# EAGLE board midi_to_cv (EAGLE 7.2.0)
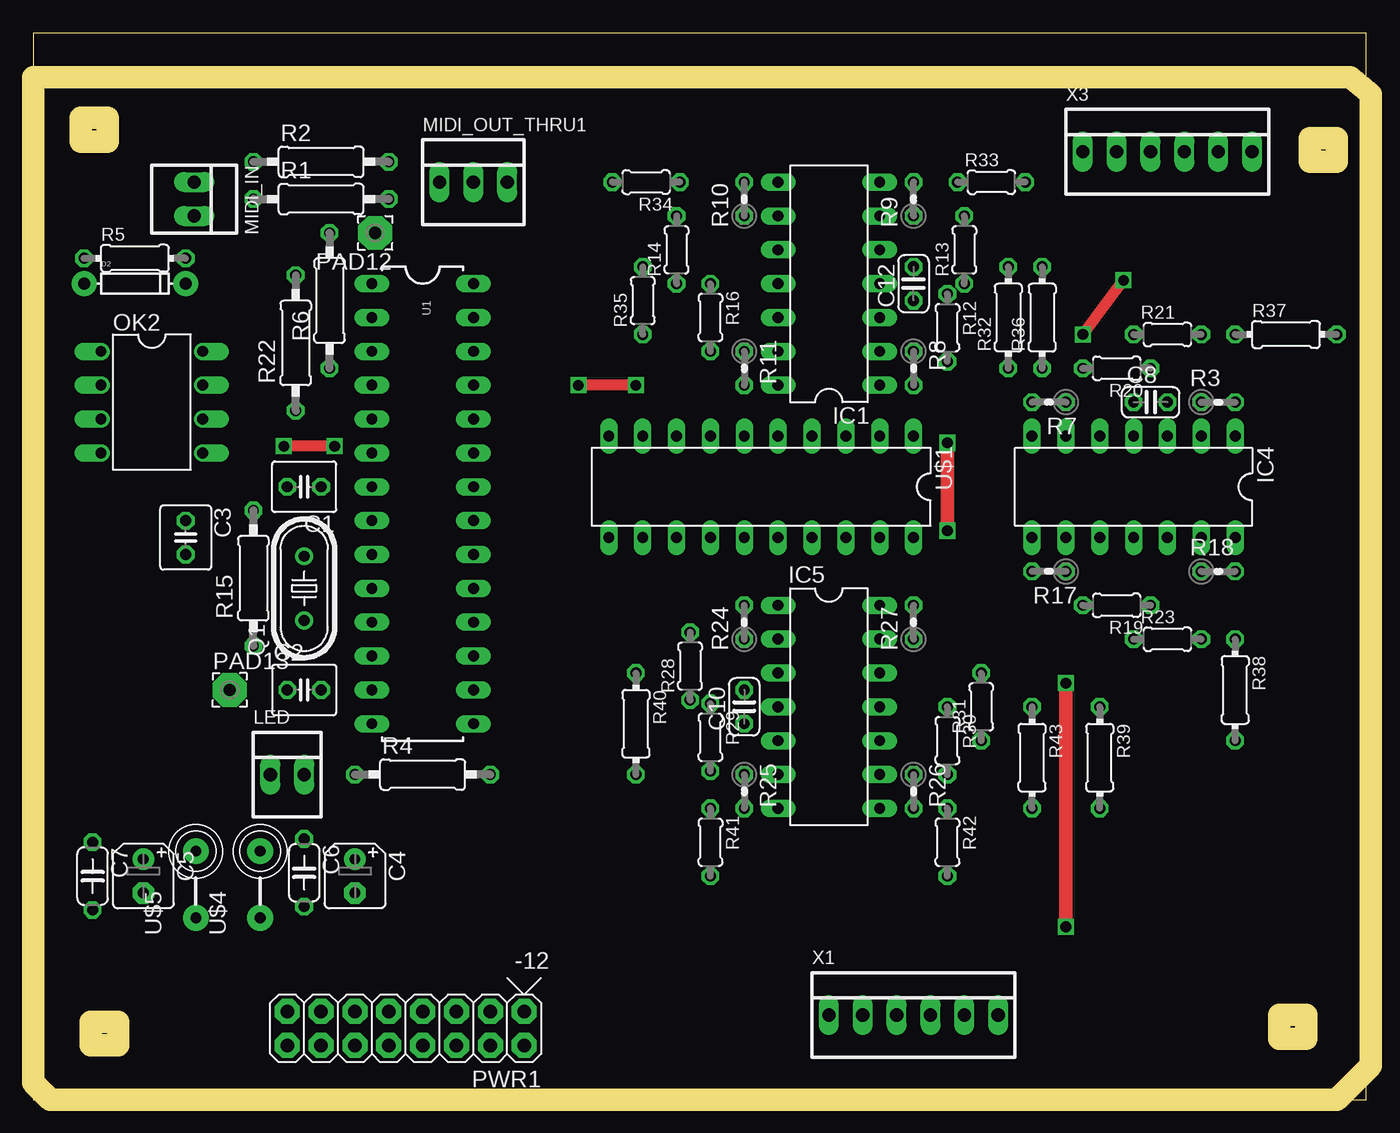
[diagram p0: board, top side]
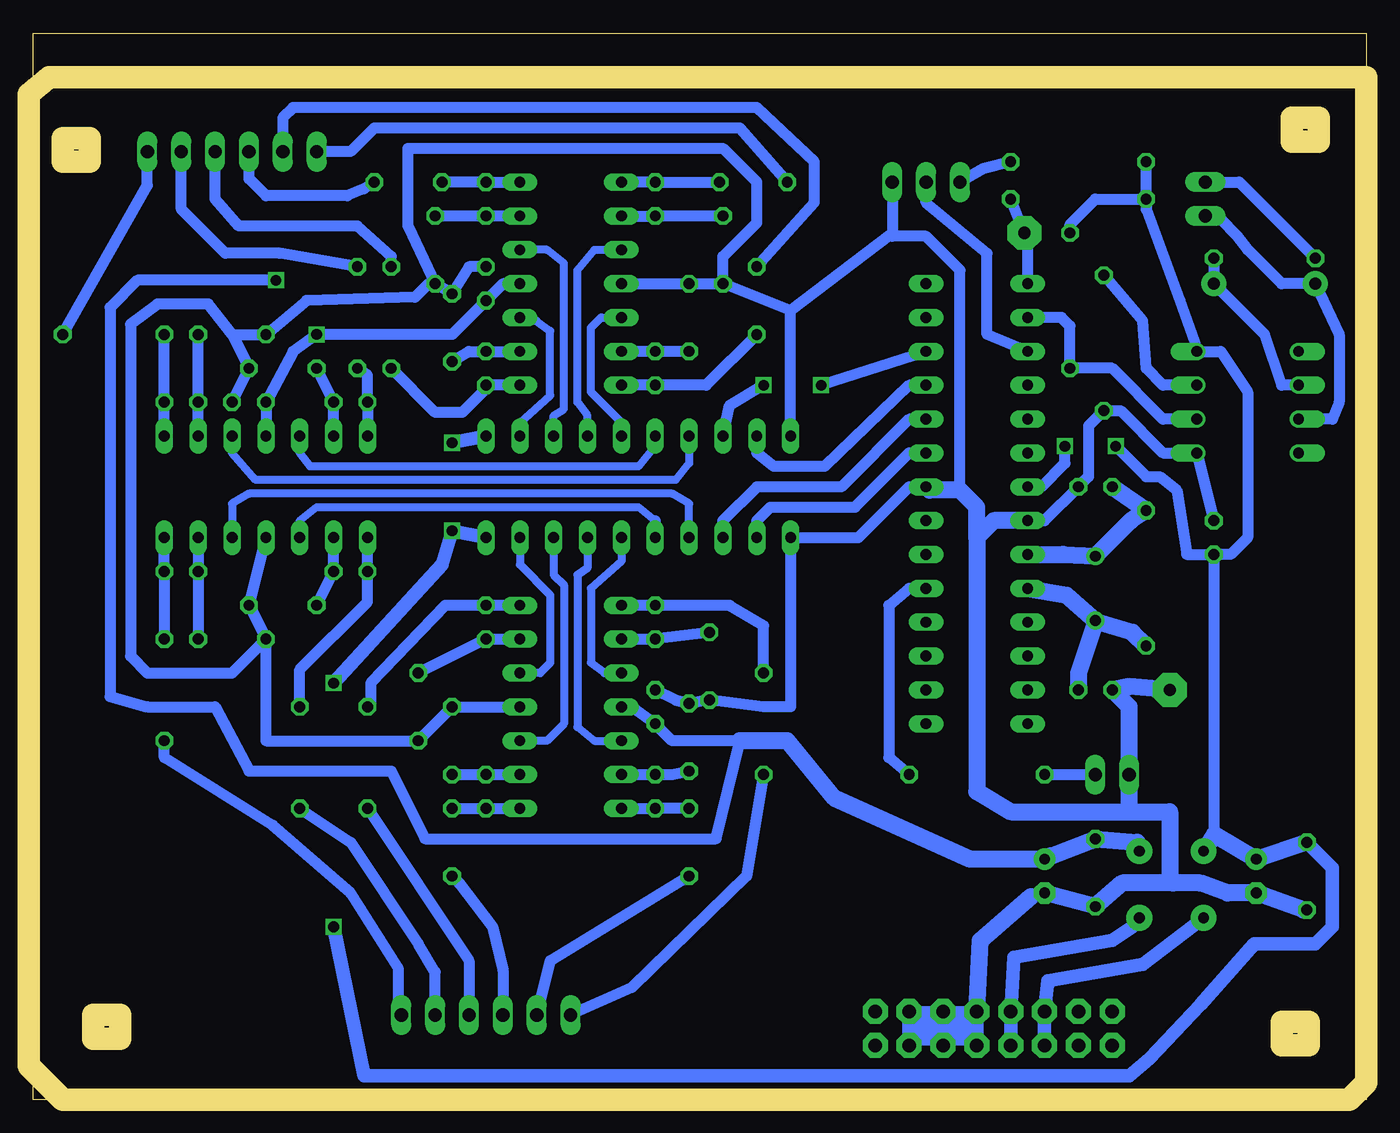
[diagram p1: board, bottom side, seen from below]

Size 100 x 80 mm. Coordinates in mm from the lower left corner, seen from the top.
Outline: 0,0 100,0 100,80 0,80 0,0
Copper layers (1*16): Top 0.035mm / dielectric 1.5mm / Bottom 0.035mm
Design rules "default *": minimum track width 24mil, minimum drill 31mil, track to track 16mil, track to pad 16mil, pad to pad 16mil, via to via 16mil, smd to smd 8mil, copper to edge 0mil, drill to drill 16mil, minimum pad ring 10mil, minimum via ring 8mil, stop-mask expansion 4mil, vias tented up to drill 0mil, thermal gap 10mil
Net classes: 0 default: width 0.635 mm, drill 0.254 mm, clearance 0.254 mm
Milling: 23 lines

## Footprints (pad centres in the part's own frame; a part is rotated, then mirrored left to right if it is on the bottom)
C025-040X050 = drill 0.813 octagon: 1 -1.27,0; 2 1.27,0
B45181A = drill 0.813 pad 1.6: + -1.27,0 | drill 0.813 pad 1.6 octagon: - 1.27,0
C050-024X044 = drill 0.813 octagon: 1 -2.54,0; 2 2.54,0
C025-024X044 = drill 0.813 octagon: 1 -1.27,0; 2 1.27,0
DIODE-1N4148 = drill 0.9 pad 1.88: A -3.81,0; C 3.81,0
DIL14 = drill 0.813 long: 1 -7.62,-3.81; 2 -5.08,-3.81; 3 -2.54,-3.81; 4 0,-3.81; 5 2.54,-3.81; 6 5.08,-3.81; 7 7.62,-3.81; 8 7.62,3.81; 9 5.08,3.81; 10 2.54,3.81; 11 0,3.81; 12 -2.54,3.81; 13 -5.08,3.81; 14 -7.62,3.81
22-23-2021 = drill 1 long: 1 -1.27,0; 2 1.27,0
22-23-2031 = drill 1 long: 1 -2.54,0; 2 0,0; 3 2.54,0
DIL08 = drill 0.813 offset: 1 -3.81,-3.81; 2 -1.27,-3.81; 3 1.27,-3.81; 4 3.81,-3.81; 5 3.81,3.81; 6 1.27,3.81; 7 -1.27,3.81; 8 -3.81,3.81
2,54/0,9 = drill 0.914 pad 2.54 octagon: 1 0,0
POWER_16 = drill 1.016 pad 1.88 octagon: 1 -6.35,-1.27; 2 -6.35,1.27; 3 -3.81,-1.27; 4 -3.81,1.27; 5 -1.27,-1.27; 6 -1.27,1.27; 7 1.27,-1.27; 8 1.27,1.27; 9 3.81,-1.27; 10 3.81,1.27; 11 6.35,-1.27; 12 6.35,1.27; 13 8.89,-1.27; 14 8.89,1.27; 15 11.43,-1.27; 16 11.43,1.27
HC49U-V = drill 0.813: 1 -2.413,0; 2 2.413,0
0207/10 = drill 0.813 octagon: 1 -5.08,0; 2 5.08,0
0204V = drill 0.813 octagon: 1 -1.27,0; 2 1.27,0
0204/7 = drill 0.813 octagon: 1 -3.81,0; 2 3.81,0
0204/5 = drill 0.813 octagon: 1 -2.54,0; 2 2.54,0
DIL28-3 = drill 0.813 long: 1 -16.51,-3.81; 2 -13.97,-3.81; 3 -11.43,-3.81; 4 -8.89,-3.81; 5 -6.35,-3.81; 6 -3.81,-3.81; 7 -1.27,-3.81; 8 1.27,-3.81; 9 3.81,-3.81; 10 6.35,-3.81; 11 8.89,-3.81; 12 11.43,-3.81; 13 13.97,-3.81; 14 16.51,-3.81; 15 16.51,3.81; 16 13.97,3.81; 17 11.43,3.81; 18 8.89,3.81; 19 6.35,3.81; 20 3.81,3.81; 21 1.27,3.81; 22 -1.27,3.81; 23 -3.81,3.81; 24 -6.35,3.81; 25 -8.89,3.81; 26 -11.43,3.81; 27 -13.97,3.81; 28 -16.51,3.81
DIL20 = drill 0.813 long: 1 -11.43,-3.81; 2 -8.89,-3.81; 3 -6.35,-3.81; 4 -3.81,-3.81; 5 -1.27,-3.81; 6 1.27,-3.81; 7 3.81,-3.81; 8 6.35,-3.81; 9 8.89,-3.81; 10 11.43,-3.81; 11 11.43,3.81; 12 8.89,3.81; 13 6.35,3.81; 14 3.81,3.81; 15 1.27,3.81; 16 -1.27,3.81; 17 -3.81,3.81; 18 -6.35,3.81; 19 -8.89,3.81; 20 -11.43,3.81
FB = drill 0.8 pad 1.93: P$1 -2.5,0; P$2 2.5,0
22-23-2061 = drill 1 long: 1 -6.35,0; 2 -3.81,0; 3 -1.27,0; 4 1.27,0; 5 3.81,0; 6 6.35,0

## Placement (x,y rotation side)
C1  27pF  [C025-040X050]  20.32,45.97 180 top
C2  27pF  [C025-040X050]  20.32,30.73 0 top
C3  100n  [C025-040X050]  11.43,42.16 270 top
C4  10u  [B45181A]  24.13,16.76 270 top
C5  10u  [B45181A]  8.26,16.76 270 top
C6  100n  [C050-024X044]  20.32,17.02 270 top
C7  100n  [C050-024X044]  4.45,16.76 270 top
C8  100n  [C025-024X044]  83.82,52.32 0 top
C10  100n  [C025-024X044]  53.34,29.46 90 top
C12  100n  [C025-024X044]  66.04,61.21 90 top
D2  [DIODE-1N4148]  7.62,61.21 0 top
IC1  TL074P  [DIL14]  59.69,61.21 90 top
IC4  TL074P  [DIL14]  82.55,45.97 180 top
IC5  TL074P  [DIL14]  59.69,29.46 270 top
LED  22-23-2021  [22-23-2021]  19.05,24.38 0 top
MIDI_IN  22-23-2021  [22-23-2021]  12.06,67.56 270 top
MIDI_OUT_THRU1  22-23-2031  [22-23-2031]  33.02,68.83 0 top
OK2  6N138  [DIL08]  8.89,52.32 270 top
PAD12  reset  [2,54/0,9]  25.65,65.02 180 top
PAD13  reset  [2,54/0,9]  14.73,30.73 0 top
PWR1  POWER  [POWER_16]  30.48,5.33 180 top
Q1  [HC49U-V]  20.32,38.35 90 top
R1  10k  [0207/10]  21.59,67.56 0 top
R2  220  [0207/10]  21.59,70.36 0 top
R3  1k8  [0204V]  88.9,52.32 0 top
R4  4.7k  [0207/10]  29.21,24.38 0 top
R5  220  [0204/7]  7.62,63.12 0 top
R6  270  [0207/10]  22.23,59.94 90 top
R7  1k8  [0204V]  76.2,52.32 180 top
R8  1k8  [0204V]  66.04,54.86 270 top
R9  1k8  [0204V]  66.04,67.56 90 top
R10  1k8  [0204V]  53.34,67.56 90 top
R11  1k8  [0204V]  53.34,54.86 270 top
R12  1k  [0204/5]  68.58,57.91 270 top
R13  1k  [0204/5]  69.85,63.75 90 top
R14  1k  [0204/5]  48.26,63.75 90 top
R15  1M  [0207/10]  16.51,39.12 90 top
R16  1k  [0204/5]  50.8,58.67 270 top
R17  1k8  [0204V]  76.2,39.62 180 top
R18  1k8  [0204V]  88.9,39.62 0 top
R19  1k  [0204/5]  81.28,37.08 180 top
R20  1k  [0204/5]  81.28,54.86 180 top
R21  1k  [0204/5]  85.09,57.4 0 top
R22  2k4  [0207/10]  19.68,56.77 90 top
R23  1k  [0204/5]  85.09,34.54 0 top
R24  1k8  [0204V]  53.34,35.81 90 top
R25  1k8  [0204V]  53.34,23.11 270 top
R26  1k8  [0204V]  66.04,23.11 270 top
R27  1k8  [0204V]  66.04,35.81 90 top
R28  1k  [0204/5]  49.28,32.51 90 top
R29  1k  [0204/5]  50.8,27.18 270 top
R30  1k  [0204/5]  68.58,26.92 270 top
R31  1k  [0204/5]  71.12,29.46 90 top
R32  1k  [0204/7]  73.15,58.67 90 top
R33  1k  [0204/5]  71.88,68.83 0 top
R34  1k  [0204/5]  45.97,68.83 180 top
R35  1k  [0204/5]  45.72,59.94 90 top
R36  1k  [0204/7]  75.69,58.67 90 top
R37  1k  [0204/7]  93.98,57.4 0 top
R38  1k  [0204/7]  90.17,30.73 270 top
R39  1k  [0204/7]  80.01,25.65 270 top
R40  1k  [0204/7]  45.21,28.19 270 top
R41  1k  [0204/5]  50.8,19.3 270 top
R42  1k  [0204/5]  68.58,19.3 270 top
R43  1k  [0204/7]  74.93,25.65 270 top
U1  ATMEGA328P_PDIP  [DIL28-3]  29.21,44.7 270 top
U$1  AD8804  [DIL20]  54.61,45.97 180 top
U$4  FB  [FB]  17.02,16.13 90 top
U$5  FB  [FB]  12.19,16.13 90 top
X1  [22-23-2061]  66.04,6.35 0 top
X3  [22-23-2061]  85.09,71.12 0 top

## Library data of the parts
C1-C8 C10 C12 R1-R43 = rcl
D2 = SparkFun-DiscreteSemi
IC1 IC4 IC5 = linear
LED MIDI_IN = con-molex; MF: MOLEX; MPN: 22-23-2021; OC_FARNELL: 1462926; OC_NEWARK: 25C3832
MIDI_OUT_THRU1 = con-molex; MF: MOLEX; MPN: 22-23-2031; OC_FARNELL: 1462950; OC_NEWARK: 30C0862
OK2 = optocoupler; MF: VISHAY/TELEFUNKEN; MPN: 6N138; OC_FARNELL: 9860150; OC_NEWARK: 35K5294
PAD12 PAD13 = wirepad
PWR1 = eurorack
Q1 = crystal; OC_FARNELL: 1666969; OC_NEWARK: unknown
U1 = SparkFun-DigitalIC
U$1 = ic-package
U$4 U$5 = adafruit
X1 X3 = con-molex; MF: MOLEX; MPN: 22-23-2061; OC_FARNELL: 1462922; OC_NEWARK: 27C1933

## Nets
+5V: C3.2 C5.+ C7.1 OK2.8 R1.1 R2.1 R6.2 U1.7 U$1.1 U$1.20 U$5.P$2
+12V: C4.+ C6.1 C8.1 C10.1 C12.1 IC1.4 IC4.4 IC5.4 U$4.P$2
GND: C1.1 C2.1 C3.1 C4.- C5.- C6.2 C7.2 C8.2 C10.2 C12.2 IC1.11 IC4.11 IC5.11 LED.1 MIDI_OUT_THRU1.3 OK2.5 PAD13.1 PWR1.3 PWR1.4 PWR1.5 PWR1.6 PWR1.7 PWR1.8 R12.1 R13.1 R14.1 R16.1 R19.1 R20.1 R21.1 R22.1 R23.1 R28.1 R29.1 R30.1 R31.1 U1.8 U1.22 U$1.10 U$1.11
N$1: PAD12.1 R1.2 U1.1
N$2: PWR1.9 PWR1.10 U$4.P$1
N$3: U1.26 U$1.8
N$4: C1.2 Q1.2 R15.2 U1.9
N$5: C2.2 Q1.1 R15.1 U1.10
N$6: U1.25 U$1.9
N$7: U1.23 U$1.12
N$8: U1.24 U$1.13
N$9: MIDI_OUT_THRU1.1 R2.2
N$10: R4.2 U1.19
N$11: LED.2 R4.1
N$12: MIDI_OUT_THRU1.2 U1.3
N$13: IC1.2 R8.1 R12.2
N$14: IC1.9 R10.1 R14.2
N$15: IC1.6 R9.1 R13.2
N$16: IC4.7 R7.2 R36.1
N$17: D2.A MIDI_IN.2 OK2.3
N$18: D2.C OK2.2 R5.2
N$19: MIDI_IN.1 R5.1
N$20: OK2.6 R6.1 U1.2
N$21: IC1.13 R11.1 R16.2
N$22: IC4.8 R17.2 R39.1
N$23: IC4.14 R18.2 R38.1
N$24: IC4.9 R17.1 R19.2
N$25: R34.2 X3.1
N$26: IC1.3 U$1.2
N$27: IC1.5 U$1.3
N$28: IC1.10 U$1.4
N$29: IC1.12 U$1.5
N$30: IC4.6 R7.1 R20.2
N$31: IC4.2 R3.1 R21.2
N$32: IC4.5 U$1.6
N$33: IC4.3 U$1.7
N$34: IC4.12 U$1.14
N$35: IC4.10 U$1.15
N$36: IC4.13 R18.1 R23.2
N$37: IC4.1 R3.2 R37.1
N$38: R35.2 X3.2
N$39: R33.2 X3.3
N$40: R32.2 X3.4
N$41: IC5.3 U$1.16
N$42: IC5.5 U$1.17
N$43: IC5.10 U$1.18
N$44: IC5.12 U$1.19
N$45: IC5.2 R24.1 R28.2
N$46: IC5.6 R25.1 R29.2
N$47: IC5.9 R26.1 R30.2
N$48: IC5.13 R27.1 R31.2
N$49: IC5.1 R24.2 R40.1
N$50: IC5.7 R25.2 R41.1
N$51: IC5.8 R26.2 R42.1
N$52: IC5.14 R27.2 R43.1
N$53: IC1.1 R8.2 R32.1
N$54: IC1.7 R9.2 R33.1
N$55: IC1.8 R10.2 R34.1
N$56: IC1.14 R11.2 R35.1
N$57: R36.2 X3.5
N$58: R37.2 X3.6
N$59: R40.2 X1.1
N$60: OK2.7 R22.2
N$61: R41.2 X1.2
N$62: PWR1.11 PWR1.12 U$5.P$1
N$63: R42.2 X1.3
N$64: R43.2 X1.4
N$65: R39.2 X1.5
N$66: R38.2 X1.6

## Tracks (layer width: path | path; a pad name or v marks a point on that pad's centre or on a via)
+5V  (via drill 0.8)
  Top 0.813: v22.61,49.02 v18.8,49.02
  Top 1.016: v68.58,49.28 v68.58,42.67 | v77.47,12.95 v77.47,31.24
  Bottom 0.813: R6.2 22.23,65.66 20.32,67.56 R1.1 | R1.1 R2.1 | R1.1 16.51,66.8 13.97,59.94 12.7,56.39 OK2.8 10.92,56.13 8.89,53.09 8.89,42.16 10.16,40.89 C3.2 | C3.2 11.43,19.9 U$5.P$2 | U1.7 24.38,45.97 22.61,47.75 v22.61,49.02 | v18.8,49.02 16.51,46.74 15.49,46.74 14.22,45.72 13.46,40.89 C3.2
  Bottom 1.016: U$1.1 v68.58,49.28 | U$1.20 v68.58,42.67 69.34,40.13 v77.47,31.24 | C7.1 2.54,17.4 2.54,12.95 3.81,11.68 8.38,11.68 12.45,7.11 16.26,3.05 17.78,1.78 75.18,1.78 v77.47,12.95
  Bottom 1.27: U$5.P$2 11.39,19.9 C5.+ C7.1
+12V  (via drill 0.8)
  Top 0.813: v78.74,57.4 v81.79,61.47
  Bottom 0.813: C4.+ 23.62,18.29 | IC1.4 64.77,61.21 C12.1 68.58,57.4 v78.74,57.4 80.52,56.13 C8.1 IC4.4 | IC5.4 55.12,29.46 C10.1 52.07,26.92 46.99,26.92 48.77,19.56 70.61,19.56 73.15,24.64 83.82,24.64 86.36,29.46 91.44,29.46 94.23,30.23 94.23,59.44 92.2,61.47 v81.79,61.47
  Bottom 1.27: 23.62,18.29 C6.1 17.18,19.3 U$4.P$2 | C4.+ 29.72,18.03 39.88,22.61 43.43,26.92 46.99,26.92
GND
  Bottom 0.813: U$1.10 43.18,59.18 | 43.18,59.18 R14.1 | R14.1 R16.1 IC1.11 | R13.1 R12.1 67.31,62.48 C12.2 | R23.1 R19.1 IC4.11 | U1.8 24.13,43.43 C1.1 20.83,46.74 20.83,50.55 R22.1 18.41,51.69 15.24,48.51 OK2.5 C3.1 | PWR1.7 PWR1.5 PWR1.3 | C10.2 51.82,29.97 R29.1 R28.1 45.21,29.46 43.18,29.46 U$1.11 38.1,42.16 34.29,45.97 U1.22 32.77,45.72 | IC5.11 R30.1 R31.1 82.55,26.92 R23.1 | R13.1 70.36,61.21 71.37,60.2 79.5,59.94 R21.1 85.09,57.4 | 85.09,57.4 86.87,59.69 90.68,59.69 92.71,58.17 92.71,33.27 91.44,32 85.09,32 R23.1 | 14.73,16.51 14.48,16.26 | R13.1 71.88,65.53 71.88,71.37 48.26,71.37 45.72,68.83 45.72,65.79 48.26,63.25 R14.1 | MIDI_OUT_THRU1.3 35.56,65.02 35.69,64.9 | 35.69,64.9 43.18,59.18 | C8.2 R20.1 85.09,57.4 | 30.48,45.72 30.48,62.23 33.02,64.77 35.56,64.77 35.69,64.9
  Bottom 1.016: C7.2 4.7,14.22 | PWR1.8 PWR1.7 | PWR1.5 PWR1.6 | PWR1.4 PWR1.3 | 25.15,15.24 C4.-
  Bottom 1.27: PAD13.1 17.78,30.99 C2.1 17.78,29.46 LED.1 17.78,21.59 | U1.8 27.94,43.43 29.21,42.16 | 29.21,42.16 29.21,23.11 26.67,21.59 17.78,21.59 | PWR1.7 28.96,11.94 25.15,15.24 | C4.- C6.2 18.29,16.26 14.48,16.26 12.45,16.26 10.41,15.49 C5.- 4.7,14.22 | 17.78,21.59 14.73,21.59 14.73,16.51 | 29.21,42.16 29.21,44.45 30.48,45.72 32.77,45.72
N$1
  Bottom 0.813: R1.2 PAD12.1 25.4,63.75 U1.1
N$2
  Bottom 0.813: U$4.P$1 17.53,12.95
  Bottom 1.016: 17.53,12.95 19.05,11.94 26.42,10.67 PWR1.9 PWR1.10
N$3  (via drill 0.8)
  Top 0.813: v45.21,53.59 v40.89,53.59
  Bottom 0.813: U$1.8 47.75,52.07 v45.21,53.59 | v40.89,53.59 U1.26
N$4
  Bottom 1.27: U1.9 22.73,40.89 Q1.2 17.65,43.43 R15.2 C1.2
N$5
  Bottom 0.813: 20.32,35.81 Q1.1 20.19,35.81
  Bottom 1.27: U1.10 22.48,37.85 Q1.1 | 20.32,35.81 21.59,32 C2.2 | R15.1 17.53,35.05 20.19,35.81
N$6
  Bottom 0.813: U1.25 34.29,53.59 40.64,47.5 44.45,47.5 45.72,48.51 U$1.9
N$7
  Bottom 0.813: U$1.12 45.72,43.43 44.7,44.45 38.35,44.45 34.29,48.51 U1.23
N$8
  Bottom 0.813: U1.24 34.29,51.05 39.37,45.97 45.72,45.97 48.26,43.43 U$1.13
N$9
  Bottom 0.813: R2.2 28.7,69.85 MIDI_OUT_THRU1.1
N$10
  Bottom 0.813: U1.19 34.29,38.35 35.81,37.08 35.81,25.65 R4.2
N$11
  Bottom 0.813: R4.1 LED.2
N$12
  Bottom 0.813: U1.3 28.45,57.4 28.45,63.5 33.02,67.31 MIDI_OUT_THRU1.2
N$13
  Bottom 0.813: IC1.2 R8.1 67.31,56.13 R12.2
N$14
  Bottom 0.813: R14.2 R10.1 IC1.9
N$15
  Bottom 0.813: R13.2 R9.1 IC1.6
N$16
  Bottom 0.813: IC4.7 R7.2 74.93,54.36 R36.1
N$17
  Bottom 0.813: MIDI_IN.2 10.92,66.04 9.65,64.77 8.89,63.75 6.35,61.21 D2.A 2.03,57.4 2.03,52.32 2.54,51.05 OK2.3
N$18
  Bottom 0.813: R5.2 D2.C 7.62,57.4 6.35,53.59 OK2.2
N$19
  Bottom 0.813: MIDI_IN.1 9.53,68.83 R5.1
N$20
  Bottom 0.813: OK2.6 15.24,51.05 19.05,54.86 R6.1 22.23,58.04 22.86,58.67 U1.2
N$21
  Bottom 0.813: IC1.13 R11.1 R16.2
N$22
  Bottom 0.813: R39.1 80.01,32.26 74.93,37.34 R17.2 IC4.8
N$23
  Bottom 0.813: IC4.14 R18.2 R38.1
N$24
  Bottom 0.813: IC4.9 R17.1 R19.2
N$25
  Bottom 0.813: R34.2 46.99,72.9 74.43,72.9 74.43,72.89 76.2,71.12 X3.1
N$26
  Bottom 0.61: U$1.2 63.5,50.8 61.21,52.83 61.21,57.66 62.23,58.42 63.25,58.42 IC1.3
N$27
  Bottom 0.61: U$1.3 60.96,51.31 60.2,51.82 60.2,62.74 61.47,63.75 IC1.5
N$28
  Bottom 0.61: U$1.4 58.42,51.31 59.18,52.32 59.18,62.23 57.91,63.75 IC1.10
N$29
  Bottom 0.61: U$1.5 55.88,50.8 58.17,53.09 58.17,57.91 57.4,58.67 IC1.12
N$30
  Bottom 0.813: IC4.6 R7.1 R20.2
N$31
  Bottom 0.813: IC4.2 R3.1 R21.2
N$32
  Bottom 0.61: U$1.6 53.34,49.02 54.61,47.5 79.25,47.5 80.01,48.51 IC4.5
N$33
  Bottom 0.61: U$1.7 50.8,47.75 51.82,46.48 83.31,46.48 85.09,48.51 IC4.3
N$34
  Bottom 0.61: U$1.14 50.8,44.7 52.07,45.47 83.82,45.47 85.09,44.7 IC4.12
N$35
  Bottom 0.61: IC4.10 80.01,43.43 78.74,44.45 54.61,44.45 53.34,43.43
  Bottom 0.813: 53.34,43.43 U$1.15
N$36
  Bottom 0.813: IC4.13 R18.1 R23.2
N$37
  Bottom 0.813: IC4.1 R3.2 R37.1
N$38
  Bottom 0.813: R35.2 41.4,67.31 41.4,70.36 45.72,74.42 80.52,74.42 81.28,73.66 X3.2
N$39
  Bottom 0.813: R33.2 75.18,68.33 76.45,67.82 82.55,67.82 83.82,69.09 X3.3
N$40
  Bottom 0.813: R32.2 73.15,63.25 75.69,65.53 84.58,65.53 86.36,67.56 X3.4
N$41
  Bottom 0.61: U$1.16 55.88,40.39 58.17,38.35 58.17,32.77 57.15,32 IC5.3
N$42
  Bottom 0.61: U$1.17 58.42,39.88 59.18,39.37 59.18,27.94 57.91,26.92 IC5.5
N$43
  Bottom 0.61: U$1.18 60.96,39.37 60.2,38.61 60.2,28.19 61.47,26.92 IC5.10
N$44
  Bottom 0.61: U$1.19 63.5,40.13 61.21,37.85 61.21,32.77 61.98,32 IC5.12
N$45
  Bottom 0.813: IC5.2 R24.1 R28.2
N$46
  Bottom 0.813: IC5.6 R25.1 52.07,24.38 R29.2
N$47
  Bottom 0.813: R30.2 R26.1 IC5.9
N$48
  Bottom 0.813: IC5.13 R27.1 R31.2
N$49
  Bottom 0.813: IC5.1 R24.2 47.75,37.08 45.21,35.56 R40.1
N$50
  Bottom 0.813: IC5.7 R25.2 R41.1
N$51
  Bottom 0.813: IC5.8 R26.2 R42.1
N$52
  Bottom 0.813: IC5.14 R27.2 69.09,37.08 74.68,31.24 74.68,29.72 R43.1
N$53
  Bottom 0.813: IC1.1 R8.2 66.04,53.34 67.82,51.56 69.85,51.56 R32.1
N$54
  Bottom 0.813: IC1.7 R9.2 R33.1
N$55
  Bottom 0.813: R34.1 R10.2 IC1.8
N$56
  Bottom 0.813: IC1.14 R11.2 49.53,53.59 R35.1
N$57
  Bottom 0.813: R36.2 81.53,63.5 85.6,63.5 88.9,66.8 X3.5
N$58
  Bottom 0.813: 91.44,71.37 X3.6 91.44,68.58 R37.2
N$59
  Bottom 0.813: R40.2 46.48,16.76 55.12,8.38 X1.1
N$60
  Bottom 0.813: OK2.7 15.24,53.59 16.51,54.86 16.76,58.42 R22.2
N$61
  Bottom 0.813: R41.2 61.21,10.41 X1.2
N$62
  Bottom 1.016: U$5.P$1 16.76,10.16 23.88,8.89 PWR1.11 PWR1.12
N$63
  Bottom 0.813: R42.2 68.07,16.26 65.53,12.95 64.77,9.7 X1.3
N$64
  Bottom 0.813: R43.2 67.31,10.41 X1.4
N$65
  Bottom 0.813: R39.2 76.2,19.3 71.12,11.68 69.85,9.55 X1.5
N$66
  Bottom 0.813: R38.2 90.17,25.65 82.04,20.57 76.2,15.49 72.64,9.9 72.64,7.36 X1.6
(copper drawn outside any net)
  shapes: Bottom area x1